# EAGLE board BigBars (EAGLE 5.10)
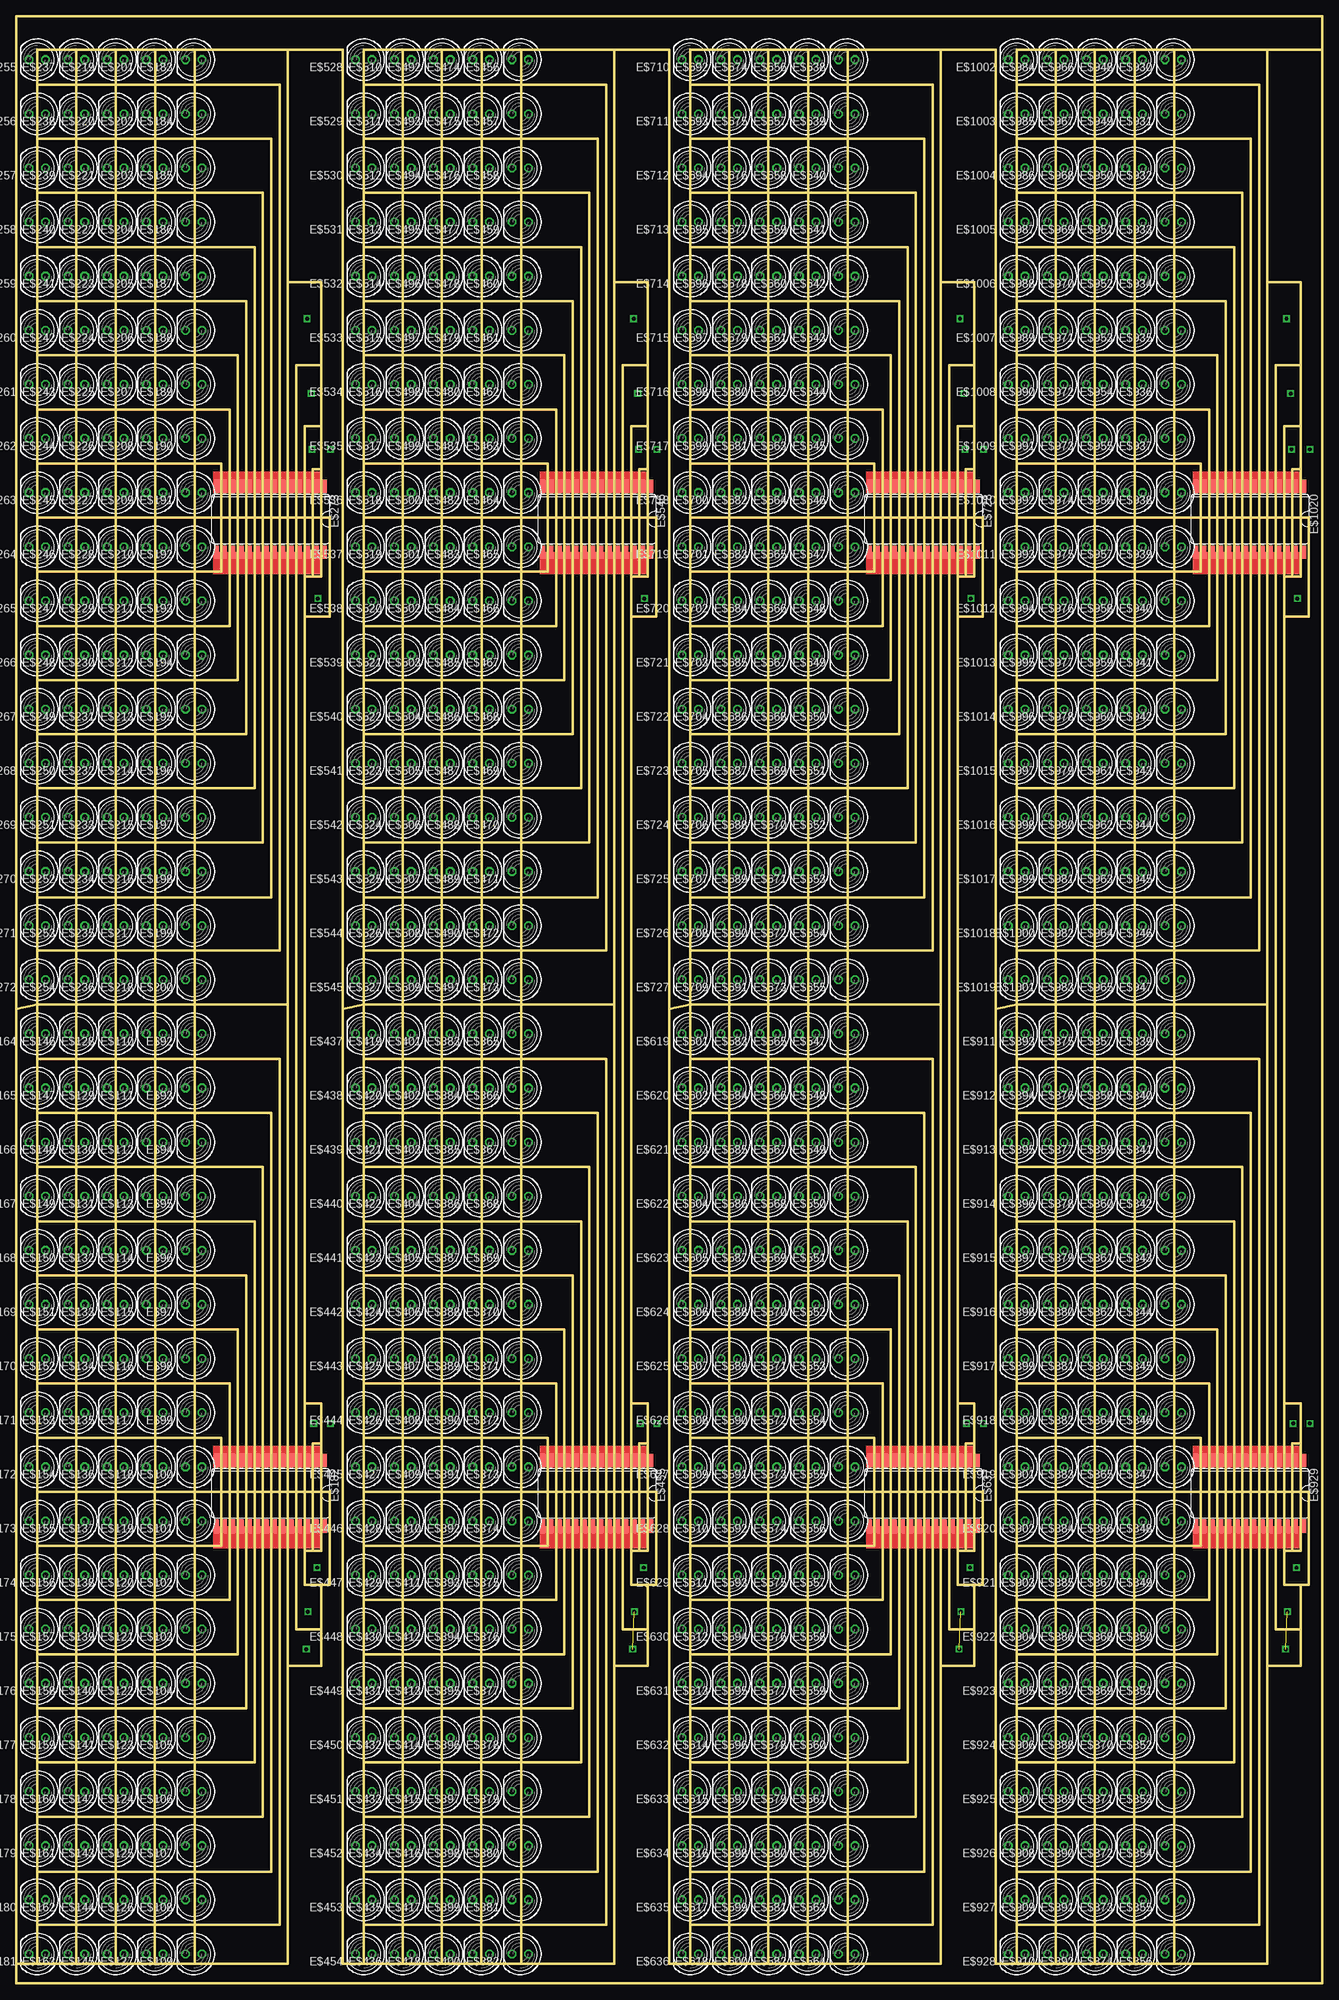
[diagram p0: board, top side]

Size 199.14 x 299.97 mm. Coordinates in mm from the lower left corner, seen from the top.
Outline: 1010 segments
Copper layers (1*16): Top 0.035mm / dielectric 1.5mm / Bottom 0.035mm
Design rules "default": minimum track width 10mil, minimum drill 24mil, track to track 8mil, track to pad 8mil, pad to pad 8mil, via to via 8mil, smd to smd 8mil, copper to edge 40mil, drill to drill 8mil, minimum pad ring 10mil, minimum via ring 8mil, stop-mask expansion 4mil, vias tented up to drill 0mil, thermal gap 10mil

## Footprints (pad centres in the part's own frame; a part is rotated, then mirrored left to right if it is on the bottom)
LED5MM = drill 0.813 octagon: A -1.27,0; K 1.27,0
SO28W = smd 0.66 x 2.032: 1 -8.255,-5.029; 2 -6.985,-5.029; 3 -5.715,-5.029; 4 -4.445,-5.029; 5 -3.175,-5.029; 6 -1.905,-5.029; 7 -0.635,-5.029; 8 0.635,-5.029; 9 1.905,-5.029; 10 3.175,-5.029; 11 4.445,-5.029; 12 5.715,-5.029; 13 6.985,-5.029; 14 8.255,-5.029; 15 8.255,5.029; 16 6.985,5.029; 17 5.715,5.029; 18 4.445,5.029; 19 3.175,5.029; 20 1.905,5.029; 21 0.635,5.029; 22 -0.635,5.029; 23 -1.905,5.029; 24 -3.175,5.029; 25 -4.445,5.029; 26 -5.715,5.029; 27 -6.985,5.029; 28 -8.255,5.029

## Placement (x,y rotation side)
E$92  [LED5MM]  27.05,144.78 180 top
E$93  [LED5MM]  27.05,136.53 180 top
E$94  [LED5MM]  27.05,128.27 180 top
E$95  [LED5MM]  27.05,120.02 180 top
E$96  [LED5MM]  27.05,111.76 180 top
E$97  [LED5MM]  27.05,103.5 180 top
E$98  [LED5MM]  27.05,95.25 180 top
E$99  [LED5MM]  27.05,87 180 top
E$100  [LED5MM]  27.05,78.74 180 top
E$101  [LED5MM]  27.05,70.48 180 top
E$102  [LED5MM]  27.05,62.23 180 top
E$103  [LED5MM]  27.05,53.98 180 top
E$104  [LED5MM]  27.05,45.72 180 top
E$105  [LED5MM]  27.05,37.47 180 top
E$106  [LED5MM]  27.05,29.21 180 top
E$107  [LED5MM]  27.05,20.95 180 top
E$108  [LED5MM]  27.05,12.7 180 top
E$109  [LED5MM]  27.05,4.45 180 top
E$110  [LED5MM]  21.08,144.78 180 top
E$111  [LED5MM]  21.08,136.53 180 top
E$112  [LED5MM]  21.08,128.27 180 top
E$113  [LED5MM]  21.08,120.02 180 top
E$114  [LED5MM]  21.08,111.76 180 top
E$115  [LED5MM]  21.08,103.5 180 top
E$116  [LED5MM]  21.08,95.25 180 top
E$117  [LED5MM]  21.08,87 180 top
E$118  [LED5MM]  21.08,78.74 180 top
E$119  [LED5MM]  21.08,70.48 180 top
E$120  [LED5MM]  21.08,62.23 180 top
E$121  [LED5MM]  21.08,53.98 180 top
E$122  [LED5MM]  21.08,45.72 180 top
E$123  [LED5MM]  21.08,37.47 180 top
E$124  [LED5MM]  21.08,29.21 180 top
E$125  [LED5MM]  21.08,20.95 180 top
E$126  [LED5MM]  21.08,12.7 180 top
E$127  [LED5MM]  21.08,4.45 180 top
E$128  [LED5MM]  15.11,144.78 180 top
E$129  [LED5MM]  15.11,136.53 180 top
E$130  [LED5MM]  15.11,128.27 180 top
E$131  [LED5MM]  15.11,120.02 180 top
E$132  [LED5MM]  15.11,111.76 180 top
E$133  [LED5MM]  15.11,103.5 180 top
E$134  [LED5MM]  15.11,95.25 180 top
E$135  [LED5MM]  15.11,87 180 top
E$136  [LED5MM]  15.11,78.74 180 top
E$137  [LED5MM]  15.11,70.48 180 top
E$138  [LED5MM]  15.11,62.23 180 top
E$139  [LED5MM]  15.11,53.98 180 top
E$140  [LED5MM]  15.11,45.72 180 top
E$141  [LED5MM]  15.11,37.47 180 top
E$142  [LED5MM]  15.11,29.21 180 top
E$143  [LED5MM]  15.11,20.95 180 top
E$144  [LED5MM]  15.11,12.7 180 top
E$145  [LED5MM]  15.11,4.45 180 top
E$146  [LED5MM]  9.14,144.78 180 top
E$147  [LED5MM]  9.14,136.53 180 top
E$148  [LED5MM]  9.14,128.27 180 top
E$149  [LED5MM]  9.14,120.02 180 top
E$150  [LED5MM]  9.14,111.76 180 top
E$151  [LED5MM]  9.14,103.5 180 top
E$152  [LED5MM]  9.14,95.25 180 top
E$153  [LED5MM]  9.14,87 180 top
E$154  [LED5MM]  9.14,78.74 180 top
E$155  [LED5MM]  9.14,70.48 180 top
E$156  [LED5MM]  9.14,62.23 180 top
E$157  [LED5MM]  9.14,53.98 180 top
E$158  [LED5MM]  9.14,45.72 180 top
E$159  [LED5MM]  9.14,37.47 180 top
E$160  [LED5MM]  9.14,29.21 180 top
E$161  [LED5MM]  9.14,20.95 180 top
E$162  [LED5MM]  9.14,12.7 180 top
E$163  [LED5MM]  9.14,4.45 180 top
E$164  [LED5MM]  3.17,144.78 180 top
E$165  [LED5MM]  3.17,136.53 180 top
E$166  [LED5MM]  3.17,128.27 180 top
E$167  [LED5MM]  3.17,120.02 180 top
E$168  [LED5MM]  3.17,111.76 180 top
E$169  [LED5MM]  3.17,103.5 180 top
E$170  [LED5MM]  3.17,95.25 180 top
E$171  [LED5MM]  3.17,87 180 top
E$172  [LED5MM]  3.17,78.74 180 top
E$173  [LED5MM]  3.17,70.48 180 top
E$174  [LED5MM]  3.17,62.23 180 top
E$175  [LED5MM]  3.17,53.98 180 top
E$176  [LED5MM]  3.17,45.72 180 top
E$177  [LED5MM]  3.17,37.47 180 top
E$178  [LED5MM]  3.17,29.21 180 top
E$179  [LED5MM]  3.17,20.95 180 top
E$180  [LED5MM]  3.17,12.7 180 top
E$181  [LED5MM]  3.17,4.45 180 top
E$182  [SO28W]  38.76,74.71 180 top
E$183  [LED5MM]  27.05,293.37 180 top
E$184  [LED5MM]  27.05,285.12 180 top
E$185  [LED5MM]  27.05,276.86 180 top
E$186  [LED5MM]  27.05,268.61 180 top
E$187  [LED5MM]  27.05,260.35 180 top
E$188  [LED5MM]  27.05,252.09 180 top
E$189  [LED5MM]  27.05,243.84 180 top
E$190  [LED5MM]  27.05,235.59 180 top
E$191  [LED5MM]  27.05,227.33 180 top
E$192  [LED5MM]  27.05,219.07 180 top
E$193  [LED5MM]  27.05,210.82 180 top
E$194  [LED5MM]  27.05,202.56 180 top
E$195  [LED5MM]  27.05,194.31 180 top
E$196  [LED5MM]  27.05,186.06 180 top
E$197  [LED5MM]  27.05,177.8 180 top
E$198  [LED5MM]  27.05,169.54 180 top
E$199  [LED5MM]  27.05,161.29 180 top
E$200  [LED5MM]  27.05,153.03 180 top
E$201  [LED5MM]  21.08,293.37 180 top
E$202  [LED5MM]  21.08,285.12 180 top
E$203  [LED5MM]  21.08,276.86 180 top
E$204  [LED5MM]  21.08,268.61 180 top
E$205  [LED5MM]  21.08,260.35 180 top
E$206  [LED5MM]  21.08,252.09 180 top
E$207  [LED5MM]  21.08,243.84 180 top
E$208  [LED5MM]  21.08,235.59 180 top
E$209  [LED5MM]  21.08,227.33 180 top
E$210  [LED5MM]  21.08,219.07 180 top
E$211  [LED5MM]  21.08,210.82 180 top
E$212  [LED5MM]  21.08,202.56 180 top
E$213  [LED5MM]  21.08,194.31 180 top
E$214  [LED5MM]  21.08,186.06 180 top
E$215  [LED5MM]  21.08,177.8 180 top
E$216  [LED5MM]  21.08,169.54 180 top
E$217  [LED5MM]  21.08,161.29 180 top
E$218  [LED5MM]  21.08,153.03 180 top
E$219  [LED5MM]  15.11,293.37 180 top
E$220  [LED5MM]  15.11,285.12 180 top
E$221  [LED5MM]  15.11,276.86 180 top
E$222  [LED5MM]  15.11,268.61 180 top
E$223  [LED5MM]  15.11,260.35 180 top
E$224  [LED5MM]  15.11,252.09 180 top
E$225  [LED5MM]  15.11,243.84 180 top
E$226  [LED5MM]  15.11,235.59 180 top
E$227  [LED5MM]  15.11,227.33 180 top
E$228  [LED5MM]  15.11,219.07 180 top
E$229  [LED5MM]  15.11,210.82 180 top
E$230  [LED5MM]  15.11,202.56 180 top
E$231  [LED5MM]  15.11,194.31 180 top
E$232  [LED5MM]  15.11,186.06 180 top
E$233  [LED5MM]  15.11,177.8 180 top
E$234  [LED5MM]  15.11,169.54 180 top
E$235  [LED5MM]  15.11,161.29 180 top
E$236  [LED5MM]  15.11,153.03 180 top
E$237  [LED5MM]  9.14,293.37 180 top
E$238  [LED5MM]  9.14,285.12 180 top
E$239  [LED5MM]  9.14,276.86 180 top
E$240  [LED5MM]  9.14,268.61 180 top
E$241  [LED5MM]  9.14,260.35 180 top
E$242  [LED5MM]  9.14,252.09 180 top
E$243  [LED5MM]  9.14,243.84 180 top
E$244  [LED5MM]  9.14,235.59 180 top
E$245  [LED5MM]  9.14,227.33 180 top
E$246  [LED5MM]  9.14,219.07 180 top
E$247  [LED5MM]  9.14,210.82 180 top
E$248  [LED5MM]  9.14,202.56 180 top
E$249  [LED5MM]  9.14,194.31 180 top
E$250  [LED5MM]  9.14,186.06 180 top
E$251  [LED5MM]  9.14,177.8 180 top
E$252  [LED5MM]  9.14,169.54 180 top
E$253  [LED5MM]  9.14,161.29 180 top
E$254  [LED5MM]  9.14,153.03 180 top
E$255  [LED5MM]  3.17,293.37 180 top
E$256  [LED5MM]  3.17,285.12 180 top
E$257  [LED5MM]  3.17,276.86 180 top
E$258  [LED5MM]  3.17,268.61 180 top
E$259  [LED5MM]  3.17,260.35 180 top
E$260  [LED5MM]  3.17,252.09 180 top
E$261  [LED5MM]  3.17,243.84 180 top
E$262  [LED5MM]  3.17,235.59 180 top
E$263  [LED5MM]  3.17,227.33 180 top
E$264  [LED5MM]  3.17,219.07 180 top
E$265  [LED5MM]  3.17,210.82 180 top
E$266  [LED5MM]  3.17,202.56 180 top
E$267  [LED5MM]  3.17,194.31 180 top
E$268  [LED5MM]  3.17,186.06 180 top
E$269  [LED5MM]  3.17,177.8 180 top
E$270  [LED5MM]  3.17,169.54 180 top
E$271  [LED5MM]  3.17,161.29 180 top
E$272  [LED5MM]  3.17,153.03 180 top
E$273  [SO28W]  38.76,223.3 180 top
E$365  [LED5MM]  76.83,144.78 180 top
E$366  [LED5MM]  76.83,136.53 180 top
E$367  [LED5MM]  76.83,128.27 180 top
E$368  [LED5MM]  76.83,120.02 180 top
E$369  [LED5MM]  76.83,111.76 180 top
E$370  [LED5MM]  76.83,103.5 180 top
E$371  [LED5MM]  76.83,95.25 180 top
E$372  [LED5MM]  76.83,87 180 top
E$373  [LED5MM]  76.83,78.74 180 top
E$374  [LED5MM]  76.83,70.48 180 top
E$375  [LED5MM]  76.83,62.23 180 top
E$376  [LED5MM]  76.83,53.98 180 top
E$377  [LED5MM]  76.83,45.72 180 top
E$378  [LED5MM]  76.83,37.47 180 top
E$379  [LED5MM]  76.83,29.21 180 top
E$380  [LED5MM]  76.83,20.95 180 top
E$381  [LED5MM]  76.83,12.7 180 top
E$382  [LED5MM]  76.83,4.45 180 top
E$383  [LED5MM]  70.87,144.78 180 top
E$384  [LED5MM]  70.87,136.53 180 top
E$385  [LED5MM]  70.87,128.27 180 top
E$386  [LED5MM]  70.87,120.02 180 top
E$387  [LED5MM]  70.87,111.76 180 top
E$388  [LED5MM]  70.87,103.5 180 top
E$389  [LED5MM]  70.87,95.25 180 top
E$390  [LED5MM]  70.87,87 180 top
E$391  [LED5MM]  70.87,78.74 180 top
E$392  [LED5MM]  70.87,70.48 180 top
E$393  [LED5MM]  70.87,62.23 180 top
E$394  [LED5MM]  70.87,53.98 180 top
E$395  [LED5MM]  70.87,45.72 180 top
E$396  [LED5MM]  70.87,37.47 180 top
E$397  [LED5MM]  70.87,29.21 180 top
E$398  [LED5MM]  70.87,20.95 180 top
E$399  [LED5MM]  70.87,12.7 180 top
E$400  [LED5MM]  70.87,4.45 180 top
E$401  [LED5MM]  64.9,144.78 180 top
E$402  [LED5MM]  64.9,136.53 180 top
E$403  [LED5MM]  64.9,128.27 180 top
E$404  [LED5MM]  64.9,120.02 180 top
E$405  [LED5MM]  64.9,111.76 180 top
E$406  [LED5MM]  64.9,103.5 180 top
E$407  [LED5MM]  64.9,95.25 180 top
E$408  [LED5MM]  64.9,87 180 top
E$409  [LED5MM]  64.9,78.74 180 top
E$410  [LED5MM]  64.9,70.48 180 top
E$411  [LED5MM]  64.9,62.23 180 top
E$412  [LED5MM]  64.9,53.98 180 top
E$413  [LED5MM]  64.9,45.72 180 top
E$414  [LED5MM]  64.9,37.47 180 top
E$415  [LED5MM]  64.9,29.21 180 top
E$416  [LED5MM]  64.9,20.95 180 top
E$417  [LED5MM]  64.9,12.7 180 top
E$418  [LED5MM]  64.9,4.45 180 top
E$419  [LED5MM]  58.93,144.78 180 top
E$420  [LED5MM]  58.93,136.53 180 top
E$421  [LED5MM]  58.93,128.27 180 top
E$422  [LED5MM]  58.93,120.02 180 top
E$423  [LED5MM]  58.93,111.76 180 top
E$424  [LED5MM]  58.93,103.5 180 top
E$425  [LED5MM]  58.93,95.25 180 top
E$426  [LED5MM]  58.93,87 180 top
E$427  [LED5MM]  58.93,78.74 180 top
E$428  [LED5MM]  58.93,70.48 180 top
E$429  [LED5MM]  58.93,62.23 180 top
E$430  [LED5MM]  58.93,53.98 180 top
E$431  [LED5MM]  58.93,45.72 180 top
E$432  [LED5MM]  58.93,37.47 180 top
E$433  [LED5MM]  58.93,29.21 180 top
E$434  [LED5MM]  58.93,20.95 180 top
E$435  [LED5MM]  58.93,12.7 180 top
E$436  [LED5MM]  58.93,4.45 180 top
E$437  [LED5MM]  52.96,144.78 180 top
E$438  [LED5MM]  52.96,136.53 180 top
E$439  [LED5MM]  52.96,128.27 180 top
E$440  [LED5MM]  52.96,120.02 180 top
E$441  [LED5MM]  52.96,111.76 180 top
E$442  [LED5MM]  52.96,103.5 180 top
E$443  [LED5MM]  52.96,95.25 180 top
E$444  [LED5MM]  52.96,87 180 top
E$445  [LED5MM]  52.96,78.74 180 top
E$446  [LED5MM]  52.96,70.48 180 top
E$447  [LED5MM]  52.96,62.23 180 top
E$448  [LED5MM]  52.96,53.98 180 top
E$449  [LED5MM]  52.96,45.72 180 top
E$450  [LED5MM]  52.96,37.47 180 top
E$451  [LED5MM]  52.96,29.21 180 top
E$452  [LED5MM]  52.96,20.95 180 top
E$453  [LED5MM]  52.96,12.7 180 top
E$454  [LED5MM]  52.96,4.45 180 top
E$455  [SO28W]  88.54,74.71 180 top
E$456  [LED5MM]  76.83,293.37 180 top
E$457  [LED5MM]  76.83,285.12 180 top
E$458  [LED5MM]  76.83,276.86 180 top
E$459  [LED5MM]  76.83,268.61 180 top
E$460  [LED5MM]  76.83,260.35 180 top
E$461  [LED5MM]  76.83,252.09 180 top
E$462  [LED5MM]  76.83,243.84 180 top
E$463  [LED5MM]  76.83,235.59 180 top
E$464  [LED5MM]  76.83,227.33 180 top
E$465  [LED5MM]  76.83,219.07 180 top
E$466  [LED5MM]  76.83,210.82 180 top
E$467  [LED5MM]  76.83,202.56 180 top
E$468  [LED5MM]  76.83,194.31 180 top
E$469  [LED5MM]  76.83,186.06 180 top
E$470  [LED5MM]  76.83,177.8 180 top
E$471  [LED5MM]  76.83,169.54 180 top
E$472  [LED5MM]  76.83,161.29 180 top
E$473  [LED5MM]  76.83,153.03 180 top
E$474  [LED5MM]  70.87,293.37 180 top
E$475  [LED5MM]  70.87,285.12 180 top
E$476  [LED5MM]  70.87,276.86 180 top
E$477  [LED5MM]  70.87,268.61 180 top
E$478  [LED5MM]  70.87,260.35 180 top
E$479  [LED5MM]  70.87,252.09 180 top
E$480  [LED5MM]  70.87,243.84 180 top
E$481  [LED5MM]  70.87,235.59 180 top
E$482  [LED5MM]  70.87,227.33 180 top
E$483  [LED5MM]  70.87,219.07 180 top
E$484  [LED5MM]  70.87,210.82 180 top
E$485  [LED5MM]  70.87,202.56 180 top
E$486  [LED5MM]  70.87,194.31 180 top
E$487  [LED5MM]  70.87,186.06 180 top
E$488  [LED5MM]  70.87,177.8 180 top
E$489  [LED5MM]  70.87,169.54 180 top
E$490  [LED5MM]  70.87,161.29 180 top
E$491  [LED5MM]  70.87,153.03 180 top
E$492  [LED5MM]  64.9,293.37 180 top
E$493  [LED5MM]  64.9,285.12 180 top
E$494  [LED5MM]  64.9,276.86 180 top
E$495  [LED5MM]  64.9,268.61 180 top
E$496  [LED5MM]  64.9,260.35 180 top
E$497  [LED5MM]  64.9,252.09 180 top
E$498  [LED5MM]  64.9,243.84 180 top
E$499  [LED5MM]  64.9,235.59 180 top
E$500  [LED5MM]  64.9,227.33 180 top
E$501  [LED5MM]  64.9,219.07 180 top
E$502  [LED5MM]  64.9,210.82 180 top
E$503  [LED5MM]  64.9,202.56 180 top
E$504  [LED5MM]  64.9,194.31 180 top
E$505  [LED5MM]  64.9,186.06 180 top
E$506  [LED5MM]  64.9,177.8 180 top
E$507  [LED5MM]  64.9,169.54 180 top
E$508  [LED5MM]  64.9,161.29 180 top
E$509  [LED5MM]  64.9,153.03 180 top
E$510  [LED5MM]  58.93,293.37 180 top
E$511  [LED5MM]  58.93,285.12 180 top
E$512  [LED5MM]  58.93,276.86 180 top
E$513  [LED5MM]  58.93,268.61 180 top
E$514  [LED5MM]  58.93,260.35 180 top
E$515  [LED5MM]  58.93,252.09 180 top
E$516  [LED5MM]  58.93,243.84 180 top
E$517  [LED5MM]  58.93,235.59 180 top
E$518  [LED5MM]  58.93,227.33 180 top
E$519  [LED5MM]  58.93,219.07 180 top
E$520  [LED5MM]  58.93,210.82 180 top
E$521  [LED5MM]  58.93,202.56 180 top
E$522  [LED5MM]  58.93,194.31 180 top
E$523  [LED5MM]  58.93,186.06 180 top
E$524  [LED5MM]  58.93,177.8 180 top
E$525  [LED5MM]  58.93,169.54 180 top
E$526  [LED5MM]  58.93,161.29 180 top
E$527  [LED5MM]  58.93,153.03 180 top
E$528  [LED5MM]  52.96,293.37 180 top
E$529  [LED5MM]  52.96,285.12 180 top
E$530  [LED5MM]  52.96,276.86 180 top
E$531  [LED5MM]  52.96,268.61 180 top
E$532  [LED5MM]  52.96,260.35 180 top
E$533  [LED5MM]  52.96,252.09 180 top
E$534  [LED5MM]  52.96,243.84 180 top
E$535  [LED5MM]  52.96,235.59 180 top
E$536  [LED5MM]  52.96,227.33 180 top
E$537  [LED5MM]  52.96,219.07 180 top
E$538  [LED5MM]  52.96,210.82 180 top
E$539  [LED5MM]  52.96,202.56 180 top
E$540  [LED5MM]  52.96,194.31 180 top
E$541  [LED5MM]  52.96,186.06 180 top
E$542  [LED5MM]  52.96,177.8 180 top
E$543  [LED5MM]  52.96,169.54 180 top
E$544  [LED5MM]  52.96,161.29 180 top
E$545  [LED5MM]  52.96,153.03 180 top
E$546  [SO28W]  88.54,223.3 180 top
E$547  [LED5MM]  126.62,144.78 180 top
E$548  [LED5MM]  126.62,136.53 180 top
E$549  [LED5MM]  126.62,128.27 180 top
E$550  [LED5MM]  126.62,120.02 180 top
E$551  [LED5MM]  126.62,111.76 180 top
E$552  [LED5MM]  126.62,103.5 180 top
E$553  [LED5MM]  126.62,95.25 180 top
E$554  [LED5MM]  126.62,87 180 top
E$555  [LED5MM]  126.62,78.74 180 top
E$556  [LED5MM]  126.62,70.48 180 top
E$557  [LED5MM]  126.62,62.23 180 top
E$558  [LED5MM]  126.62,53.98 180 top
E$559  [LED5MM]  126.62,45.72 180 top
E$560  [LED5MM]  126.62,37.47 180 top
E$561  [LED5MM]  126.62,29.21 180 top
E$562  [LED5MM]  126.62,20.95 180 top
E$563  [LED5MM]  126.62,12.7 180 top
E$564  [LED5MM]  126.62,4.45 180 top
E$565  [LED5MM]  120.65,144.78 180 top
E$566  [LED5MM]  120.65,136.53 180 top
E$567  [LED5MM]  120.65,128.27 180 top
E$568  [LED5MM]  120.65,120.02 180 top
E$569  [LED5MM]  120.65,111.76 180 top
E$570  [LED5MM]  120.65,103.5 180 top
E$571  [LED5MM]  120.65,95.25 180 top
E$572  [LED5MM]  120.65,87 180 top
E$573  [LED5MM]  120.65,78.74 180 top
E$574  [LED5MM]  120.65,70.48 180 top
E$575  [LED5MM]  120.65,62.23 180 top
E$576  [LED5MM]  120.65,53.98 180 top
E$577  [LED5MM]  120.65,45.72 180 top
E$578  [LED5MM]  120.65,37.47 180 top
E$579  [LED5MM]  120.65,29.21 180 top
E$580  [LED5MM]  120.65,20.95 180 top
E$581  [LED5MM]  120.65,12.7 180 top
E$582  [LED5MM]  120.65,4.45 180 top
E$583  [LED5MM]  114.68,144.78 180 top
E$584  [LED5MM]  114.68,136.53 180 top
E$585  [LED5MM]  114.68,128.27 180 top
E$586  [LED5MM]  114.68,120.02 180 top
E$587  [LED5MM]  114.68,111.76 180 top
E$588  [LED5MM]  114.68,103.5 180 top
E$589  [LED5MM]  114.68,95.25 180 top
E$590  [LED5MM]  114.68,87 180 top
E$591  [LED5MM]  114.68,78.74 180 top
E$592  [LED5MM]  114.68,70.48 180 top
E$593  [LED5MM]  114.68,62.23 180 top
E$594  [LED5MM]  114.68,53.98 180 top
E$595  [LED5MM]  114.68,45.72 180 top
E$596  [LED5MM]  114.68,37.47 180 top
E$597  [LED5MM]  114.68,29.21 180 top
E$598  [LED5MM]  114.68,20.95 180 top
E$599  [LED5MM]  114.68,12.7 180 top
E$600  [LED5MM]  114.68,4.45 180 top
E$601  [LED5MM]  108.71,144.78 180 top
E$602  [LED5MM]  108.71,136.53 180 top
E$603  [LED5MM]  108.71,128.27 180 top
E$604  [LED5MM]  108.71,120.02 180 top
E$605  [LED5MM]  108.71,111.76 180 top
E$606  [LED5MM]  108.71,103.5 180 top
E$607  [LED5MM]  108.71,95.25 180 top
E$608  [LED5MM]  108.71,87 180 top
E$609  [LED5MM]  108.71,78.74 180 top
E$610  [LED5MM]  108.71,70.48 180 top
E$611  [LED5MM]  108.71,62.23 180 top
E$612  [LED5MM]  108.71,53.98 180 top
E$613  [LED5MM]  108.71,45.72 180 top
E$614  [LED5MM]  108.71,37.47 180 top
E$615  [LED5MM]  108.71,29.21 180 top
E$616  [LED5MM]  108.71,20.95 180 top
E$617  [LED5MM]  108.71,12.7 180 top
E$618  [LED5MM]  108.71,4.45 180 top
E$619  [LED5MM]  102.74,144.78 180 top
E$620  [LED5MM]  102.74,136.53 180 top
E$621  [LED5MM]  102.74,128.27 180 top
E$622  [LED5MM]  102.74,120.02 180 top
E$623  [LED5MM]  102.74,111.76 180 top
E$624  [LED5MM]  102.74,103.5 180 top
E$625  [LED5MM]  102.74,95.25 180 top
E$626  [LED5MM]  102.74,87 180 top
E$627  [LED5MM]  102.74,78.74 180 top
E$628  [LED5MM]  102.74,70.48 180 top
E$629  [LED5MM]  102.74,62.23 180 top
E$630  [LED5MM]  102.74,53.98 180 top
E$631  [LED5MM]  102.74,45.72 180 top
E$632  [LED5MM]  102.74,37.47 180 top
E$633  [LED5MM]  102.74,29.21 180 top
E$634  [LED5MM]  102.74,20.95 180 top
E$635  [LED5MM]  102.74,12.7 180 top
E$636  [LED5MM]  102.74,4.45 180 top
E$637  [SO28W]  138.33,74.71 180 top
E$638  [LED5MM]  126.62,293.37 180 top
E$639  [LED5MM]  126.62,285.12 180 top
E$640  [LED5MM]  126.62,276.86 180 top
E$641  [LED5MM]  126.62,268.61 180 top
E$642  [LED5MM]  126.62,260.35 180 top
E$643  [LED5MM]  126.62,252.09 180 top
E$644  [LED5MM]  126.62,243.84 180 top
E$645  [LED5MM]  126.62,235.59 180 top
E$646  [LED5MM]  126.62,227.33 180 top
E$647  [LED5MM]  126.62,219.07 180 top
E$648  [LED5MM]  126.62,210.82 180 top
E$649  [LED5MM]  126.62,202.56 180 top
E$650  [LED5MM]  126.62,194.31 180 top
E$651  [LED5MM]  126.62,186.06 180 top
E$652  [LED5MM]  126.62,177.8 180 top
E$653  [LED5MM]  126.62,169.54 180 top
E$654  [LED5MM]  126.62,161.29 180 top
E$655  [LED5MM]  126.62,153.03 180 top
E$656  [LED5MM]  120.65,293.37 180 top
E$657  [LED5MM]  120.65,285.12 180 top
E$658  [LED5MM]  120.65,276.86 180 top
E$659  [LED5MM]  120.65,268.61 180 top
E$660  [LED5MM]  120.65,260.35 180 top
E$661  [LED5MM]  120.65,252.09 180 top
E$662  [LED5MM]  120.65,243.84 180 top
E$663  [LED5MM]  120.65,235.59 180 top
E$664  [LED5MM]  120.65,227.33 180 top
E$665  [LED5MM]  120.65,219.07 180 top
E$666  [LED5MM]  120.65,210.82 180 top
E$667  [LED5MM]  120.65,202.56 180 top
E$668  [LED5MM]  120.65,194.31 180 top
E$669  [LED5MM]  120.65,186.06 180 top
E$670  [LED5MM]  120.65,177.8 180 top
E$671  [LED5MM]  120.65,169.54 180 top
E$672  [LED5MM]  120.65,161.29 180 top
E$673  [LED5MM]  120.65,153.03 180 top
E$674  [LED5MM]  114.68,293.37 180 top
E$675  [LED5MM]  114.68,285.12 180 top
E$676  [LED5MM]  114.68,276.86 180 top
E$677  [LED5MM]  114.68,268.61 180 top
E$678  [LED5MM]  114.68,260.35 180 top
E$679  [LED5MM]  114.68,252.09 180 top
E$680  [LED5MM]  114.68,243.84 180 top
E$681  [LED5MM]  114.68,235.59 180 top
E$682  [LED5MM]  114.68,227.33 180 top
E$683  [LED5MM]  114.68,219.07 180 top
E$684  [LED5MM]  114.68,210.82 180 top
E$685  [LED5MM]  114.68,202.56 180 top
E$686  [LED5MM]  114.68,194.31 180 top
E$687  [LED5MM]  114.68,186.06 180 top
E$688  [LED5MM]  114.68,177.8 180 top
E$689  [LED5MM]  114.68,169.54 180 top
E$690  [LED5MM]  114.68,161.29 180 top
E$691  [LED5MM]  114.68,153.03 180 top
E$692  [LED5MM]  108.71,293.37 180 top
E$693  [LED5MM]  108.71,285.12 180 top
E$694  [LED5MM]  108.71,276.86 180 top
E$695  [LED5MM]  108.71,268.61 180 top
E$696  [LED5MM]  108.71,260.35 180 top
E$697  [LED5MM]  108.71,252.09 180 top
E$698  [LED5MM]  108.71,243.84 180 top
E$699  [LED5MM]  108.71,235.59 180 top
E$700  [LED5MM]  108.71,227.33 180 top
E$701  [LED5MM]  108.71,219.07 180 top
E$702  [LED5MM]  108.71,210.82 180 top
E$703  [LED5MM]  108.71,202.56 180 top
E$704  [LED5MM]  108.71,194.31 180 top
E$705  [LED5MM]  108.71,186.06 180 top
E$706  [LED5MM]  108.71,177.8 180 top
E$707  [LED5MM]  108.71,169.54 180 top
E$708  [LED5MM]  108.71,161.29 180 top
E$709  [LED5MM]  108.71,153.03 180 top
E$710  [LED5MM]  102.74,293.37 180 top
E$711  [LED5MM]  102.74,285.12 180 top
E$712  [LED5MM]  102.74,276.86 180 top
E$713  [LED5MM]  102.74,268.61 180 top
E$714  [LED5MM]  102.74,260.35 180 top
E$715  [LED5MM]  102.74,252.09 180 top
E$716  [LED5MM]  102.74,243.84 180 top
E$717  [LED5MM]  102.74,235.59 180 top
E$718  [LED5MM]  102.74,227.33 180 top
E$719  [LED5MM]  102.74,219.07 180 top
E$720  [LED5MM]  102.74,210.82 180 top
E$721  [LED5MM]  102.74,202.56 180 top
E$722  [LED5MM]  102.74,194.31 180 top
E$723  [LED5MM]  102.74,186.06 180 top
E$724  [LED5MM]  102.74,177.8 180 top
E$725  [LED5MM]  102.74,169.54 180 top
E$726  [LED5MM]  102.74,161.29 180 top
E$727  [LED5MM]  102.74,153.03 180 top
E$728  [SO28W]  138.33,223.3 180 top
E$839  [LED5MM]  176.4,144.78 180 top
E$840  [LED5MM]  176.4,136.53 180 top
E$841  [LED5MM]  176.4,128.27 180 top
E$842  [LED5MM]  176.4,120.02 180 top
E$843  [LED5MM]  176.4,111.76 180 top
E$844  [LED5MM]  176.4,103.5 180 top
E$845  [LED5MM]  176.4,95.25 180 top
E$846  [LED5MM]  176.4,87 180 top
E$847  [LED5MM]  176.4,78.74 180 top
E$848  [LED5MM]  176.4,70.48 180 top
E$849  [LED5MM]  176.4,62.23 180 top
E$850  [LED5MM]  176.4,53.98 180 top
E$851  [LED5MM]  176.4,45.72 180 top
E$852  [LED5MM]  176.4,37.47 180 top
E$853  [LED5MM]  176.4,29.21 180 top
E$854  [LED5MM]  176.4,20.95 180 top
E$855  [LED5MM]  176.4,12.7 180 top
E$856  [LED5MM]  176.4,4.45 180 top
E$857  [LED5MM]  170.43,144.78 180 top
E$858  [LED5MM]  170.43,136.53 180 top
E$859  [LED5MM]  170.43,128.27 180 top
E$860  [LED5MM]  170.43,120.02 180 top
E$861  [LED5MM]  170.43,111.76 180 top
E$862  [LED5MM]  170.43,103.5 180 top
E$863  [LED5MM]  170.43,95.25 180 top
E$864  [LED5MM]  170.43,87 180 top
E$865  [LED5MM]  170.43,78.74 180 top
E$866  [LED5MM]  170.43,70.48 180 top
E$867  [LED5MM]  170.43,62.23 180 top
E$868  [LED5MM]  170.43,53.98 180 top
E$869  [LED5MM]  170.43,45.72 180 top
E$870  [LED5MM]  170.43,37.47 180 top
E$871  [LED5MM]  170.43,29.21 180 top
E$872  [LED5MM]  170.43,20.95 180 top
E$873  [LED5MM]  170.43,12.7 180 top
E$874  [LED5MM]  170.43,4.45 180 top
E$875  [LED5MM]  164.47,144.78 180 top
E$876  [LED5MM]  164.47,136.53 180 top
E$877  [LED5MM]  164.47,128.27 180 top
E$878  [LED5MM]  164.47,120.02 180 top
E$879  [LED5MM]  164.47,111.76 180 top
E$880  [LED5MM]  164.47,103.5 180 top
E$881  [LED5MM]  164.47,95.25 180 top
E$882  [LED5MM]  164.47,87 180 top
E$883  [LED5MM]  164.47,78.74 180 top
E$884  [LED5MM]  164.47,70.48 180 top
E$885  [LED5MM]  164.47,62.23 180 top
E$886  [LED5MM]  164.47,53.98 180 top
E$887  [LED5MM]  164.47,45.72 180 top
E$888  [LED5MM]  164.47,37.47 180 top
E$889  [LED5MM]  164.47,29.21 180 top
E$890  [LED5MM]  164.47,20.95 180 top
E$891  [LED5MM]  164.47,12.7 180 top
E$892  [LED5MM]  164.47,4.45 180 top
E$893  [LED5MM]  158.5,144.78 180 top
E$894  [LED5MM]  158.5,136.53 180 top
E$895  [LED5MM]  158.5,128.27 180 top
E$896  [LED5MM]  158.5,120.02 180 top
E$897  [LED5MM]  158.5,111.76 180 top
E$898  [LED5MM]  158.5,103.5 180 top
E$899  [LED5MM]  158.5,95.25 180 top
E$900  [LED5MM]  158.5,87 180 top
E$901  [LED5MM]  158.5,78.74 180 top
E$902  [LED5MM]  158.5,70.48 180 top
E$903  [LED5MM]  158.5,62.23 180 top
E$904  [LED5MM]  158.5,53.98 180 top
E$905  [LED5MM]  158.5,45.72 180 top
E$906  [LED5MM]  158.5,37.47 180 top
E$907  [LED5MM]  158.5,29.21 180 top
E$908  [LED5MM]  158.5,20.95 180 top
E$909  [LED5MM]  158.5,12.7 180 top
E$910  [LED5MM]  158.5,4.45 180 top
E$911  [LED5MM]  152.53,144.78 180 top
E$912  [LED5MM]  152.53,136.53 180 top
E$913  [LED5MM]  152.53,128.27 180 top
E$914  [LED5MM]  152.53,120.02 180 top
E$915  [LED5MM]  152.53,111.76 180 top
E$916  [LED5MM]  152.53,103.5 180 top
E$917  [LED5MM]  152.53,95.25 180 top
E$918  [LED5MM]  152.53,87 180 top
E$919  [LED5MM]  152.53,78.74 180 top
E$920  [LED5MM]  152.53,70.48 180 top
E$921  [LED5MM]  152.53,62.23 180 top
E$922  [LED5MM]  152.53,53.98 180 top
E$923  [LED5MM]  152.53,45.72 180 top
E$924  [LED5MM]  152.53,37.47 180 top
E$925  [LED5MM]  152.53,29.21 180 top
E$926  [LED5MM]  152.53,20.95 180 top
E$927  [LED5MM]  152.53,12.7 180 top
E$928  [LED5MM]  152.53,4.45 180 top
E$929  [SO28W]  188.11,74.71 180 top
E$930  [LED5MM]  176.4,293.37 180 top
E$931  [LED5MM]  176.4,285.12 180 top
E$932  [LED5MM]  176.4,276.86 180 top
E$933  [LED5MM]  176.4,268.61 180 top
E$934  [LED5MM]  176.4,260.35 180 top
E$935  [LED5MM]  176.4,252.09 180 top
E$936  [LED5MM]  176.4,243.84 180 top
E$937  [LED5MM]  176.4,235.59 180 top
E$938  [LED5MM]  176.4,227.33 180 top
E$939  [LED5MM]  176.4,219.07 180 top
E$940  [LED5MM]  176.4,210.82 180 top
E$941  [LED5MM]  176.4,202.56 180 top
E$942  [LED5MM]  176.4,194.31 180 top
E$943  [LED5MM]  176.4,186.06 180 top
E$944  [LED5MM]  176.4,177.8 180 top
E$945  [LED5MM]  176.4,169.54 180 top
E$946  [LED5MM]  176.4,161.29 180 top
E$947  [LED5MM]  176.4,153.03 180 top
E$948  [LED5MM]  170.43,293.37 180 top
E$949  [LED5MM]  170.43,285.12 180 top
E$950  [LED5MM]  170.43,276.86 180 top
E$951  [LED5MM]  170.43,268.61 180 top
E$952  [LED5MM]  170.43,260.35 180 top
E$953  [LED5MM]  170.43,252.09 180 top
E$954  [LED5MM]  170.43,243.84 180 top
E$955  [LED5MM]  170.43,235.59 180 top
E$956  [LED5MM]  170.43,227.33 180 top
E$957  [LED5MM]  170.43,219.07 180 top
E$958  [LED5MM]  170.43,210.82 180 top
E$959  [LED5MM]  170.43,202.56 180 top
E$960  [LED5MM]  170.43,194.31 180 top
E$961  [LED5MM]  170.43,186.06 180 top
E$962  [LED5MM]  170.43,177.8 180 top
E$963  [LED5MM]  170.43,169.54 180 top
E$964  [LED5MM]  170.43,161.29 180 top
E$965  [LED5MM]  170.43,153.03 180 top
E$966  [LED5MM]  164.47,293.37 180 top
E$967  [LED5MM]  164.47,285.12 180 top
E$968  [LED5MM]  164.47,276.86 180 top
E$969  [LED5MM]  164.47,268.61 180 top
E$970  [LED5MM]  164.47,260.35 180 top
E$971  [LED5MM]  164.47,252.09 180 top
E$972  [LED5MM]  164.47,243.84 180 top
E$973  [LED5MM]  164.47,235.59 180 top
E$974  [LED5MM]  164.47,227.33 180 top
E$975  [LED5MM]  164.47,219.07 180 top
E$976  [LED5MM]  164.47,210.82 180 top
E$977  [LED5MM]  164.47,202.56 180 top
E$978  [LED5MM]  164.47,194.31 180 top
E$979  [LED5MM]  164.47,186.06 180 top
E$980  [LED5MM]  164.47,177.8 180 top
E$981  [LED5MM]  164.47,169.54 180 top
E$982  [LED5MM]  164.47,161.29 180 top
E$983  [LED5MM]  164.47,153.03 180 top
E$984  [LED5MM]  158.5,293.37 180 top
E$985  [LED5MM]  158.5,285.12 180 top
E$986  [LED5MM]  158.5,276.86 180 top
E$987  [LED5MM]  158.5,268.61 180 top
E$988  [LED5MM]  158.5,260.35 180 top
E$989  [LED5MM]  158.5,252.09 180 top
E$990  [LED5MM]  158.5,243.84 180 top
E$991  [LED5MM]  158.5,235.59 180 top
E$992  [LED5MM]  158.5,227.33 180 top
E$993  [LED5MM]  158.5,219.07 180 top
E$994  [LED5MM]  158.5,210.82 180 top
E$995  [LED5MM]  158.5,202.56 180 top
E$996  [LED5MM]  158.5,194.31 180 top
E$997  [LED5MM]  158.5,186.06 180 top
E$998  [LED5MM]  158.5,177.8 180 top
E$999  [LED5MM]  158.5,169.54 180 top
E$1000  [LED5MM]  158.5,161.29 180 top
E$1001  [LED5MM]  158.5,153.03 180 top
E$1002  [LED5MM]  152.53,293.37 180 top
E$1003  [LED5MM]  152.53,285.12 180 top
E$1004  [LED5MM]  152.53,276.86 180 top
E$1005  [LED5MM]  152.53,268.61 180 top
E$1006  [LED5MM]  152.53,260.35 180 top
E$1007  [LED5MM]  152.53,252.09 180 top
E$1008  [LED5MM]  152.53,243.84 180 top
E$1009  [LED5MM]  152.53,235.59 180 top
E$1010  [LED5MM]  152.53,227.33 180 top
E$1011  [LED5MM]  152.53,219.07 180 top
E$1012  [LED5MM]  152.53,210.82 180 top
E$1013  [LED5MM]  152.53,202.56 180 top
E$1014  [LED5MM]  152.53,194.31 180 top
E$1015  [LED5MM]  152.53,186.06 180 top
E$1016  [LED5MM]  152.53,177.8 180 top
E$1017  [LED5MM]  152.53,169.54 180 top
E$1018  [LED5MM]  152.53,161.29 180 top
E$1019  [LED5MM]  152.53,153.03 180 top
E$1020  [SO28W]  188.11,223.3 180 top

## Library data of the parts
E$92-E$181 E$183-E$272 E$365-E$454 E$456-E$545 E$547-E$636 E$638-E$727 E$839-E$928 E$930-E$1019 = led
E$182 E$273 E$455 E$546 E$637 E$728 E$929 E$1020 = linear

## Nets
GND1: E$182.1
GND2: E$273.1
GND5: E$455.1
GND6: E$546.1
GND7: E$637.1
GND10: E$728.1
GND11: E$929.1
GND12: E$1020.1

## Tracks (layer width: path | path; a pad name or v marks a point on that pad's centre or on a via)
S$1  (via drill 0.6)
  other vias: 45.97,211.2
S$2  (via drill 0.6)
  other vias: 45.85,63.37
S$3  (via drill 0.6)
  other vias: 44.45,56.64
S$4  (via drill 0.6)
  other vias: 45.09,233.93
S$5  (via drill 0.6)
  other vias: 47.88,233.93
S$6  (via drill 0.6)
  other vias: 44.96,242.44
S$7  (via drill 0.6)
  other vias: 45.34,85.34
S$8  (via drill 0.6)
  other vias: 47.88,85.34
S$9  (via drill 0.6)
  other vias: 44.32,253.87
S$10  (via drill 0.6)
  other vias: 44.2,50.93
S$19  (via drill 0.6)
  other vias: 95.76,211.2
S$20  (via drill 0.6)
  other vias: 95.63,63.37
S$21  (via drill 0.6)  (1 unrouted)
  other vias: 94.23,56.64 93.98,50.93
S$22  (via drill 0.6)
  other vias: 94.87,233.93
S$23  (via drill 0.6)
  other vias: 97.66,233.93
S$24  (via drill 0.6)
  other vias: 94.74,242.44
S$25  (via drill 0.6)
  other vias: 95.12,85.34
S$26  (via drill 0.6)
  other vias: 97.66,85.34
S$27  (via drill 0.6)
  other vias: 94.11,253.87
S$28  (via drill 0.6)
  other vias: 145.54,211.2
S$29  (via drill 0.6)
  other vias: 145.41,63.37
S$30  (via drill 0.6)  (1 unrouted)
  other vias: 144.02,56.64 143.76,50.93
S$31  (via drill 0.6)
  other vias: 144.65,233.93
S$32  (via drill 0.6)
  other vias: 147.45,233.93
S$33  (via drill 0.6)
  other vias: 144.53,242.44
S$34  (via drill 0.6)
  other vias: 144.91,85.34
S$35  (via drill 0.6)
  other vias: 147.45,85.34
S$36  (via drill 0.6)
  other vias: 143.89,253.87
S$37  (via drill 0.6)
  other vias: 195.33,211.2
S$38  (via drill 0.6)
  other vias: 195.2,63.37
S$39  (via drill 0.6)  (1 unrouted)
  other vias: 193.8,56.64 193.55,50.93
S$40  (via drill 0.6)
  other vias: 194.44,233.93
S$41  (via drill 0.6)
  other vias: 197.23,233.93
S$42  (via drill 0.6)
  other vias: 194.31,242.44
S$43  (via drill 0.6)
  other vias: 194.69,85.34
S$44  (via drill 0.6)
  other vias: 197.23,85.34
S$45  (via drill 0.6)
  other vias: 193.68,253.87
(copper drawn outside any net)
  shapes: Top area x240

## Text on the board
Unrouted: 8 | SDI | CKI | NC | NC | NC | GND | GND | GND | 7 | 6 | 5 | 4 | 3 | 2 | 1 | 0 | 12 | 14 | 15 | 16 | SDO | CKO | VCC | VCC | VCC | 9 | 10 | 11 | 13 | 17 | NC | NC | NC | NC | GND | GND | GND | 8 | 7 | 6 | 5 | 4 | 3 | 2 | SDI | CKI | NC | NC | NC | 1 | 0 | 10 | 11 | 12 | 13 | 14 | 15 | 16 | 17 | SDO | CKO | NC | NC | NC | NC | VCC | VCC | VCC | 9